# Altium PCB Exp4Board.pcbdoc
Units mil, origin at the board's own origin, x right, y up, seen from the top; angles counter-clockwise.
Board outline 4785 x 2895 mil, 2 copper layers (Top Layer, Bottom Layer); 14 components, 72 nets, 144 pads, 7 vias.
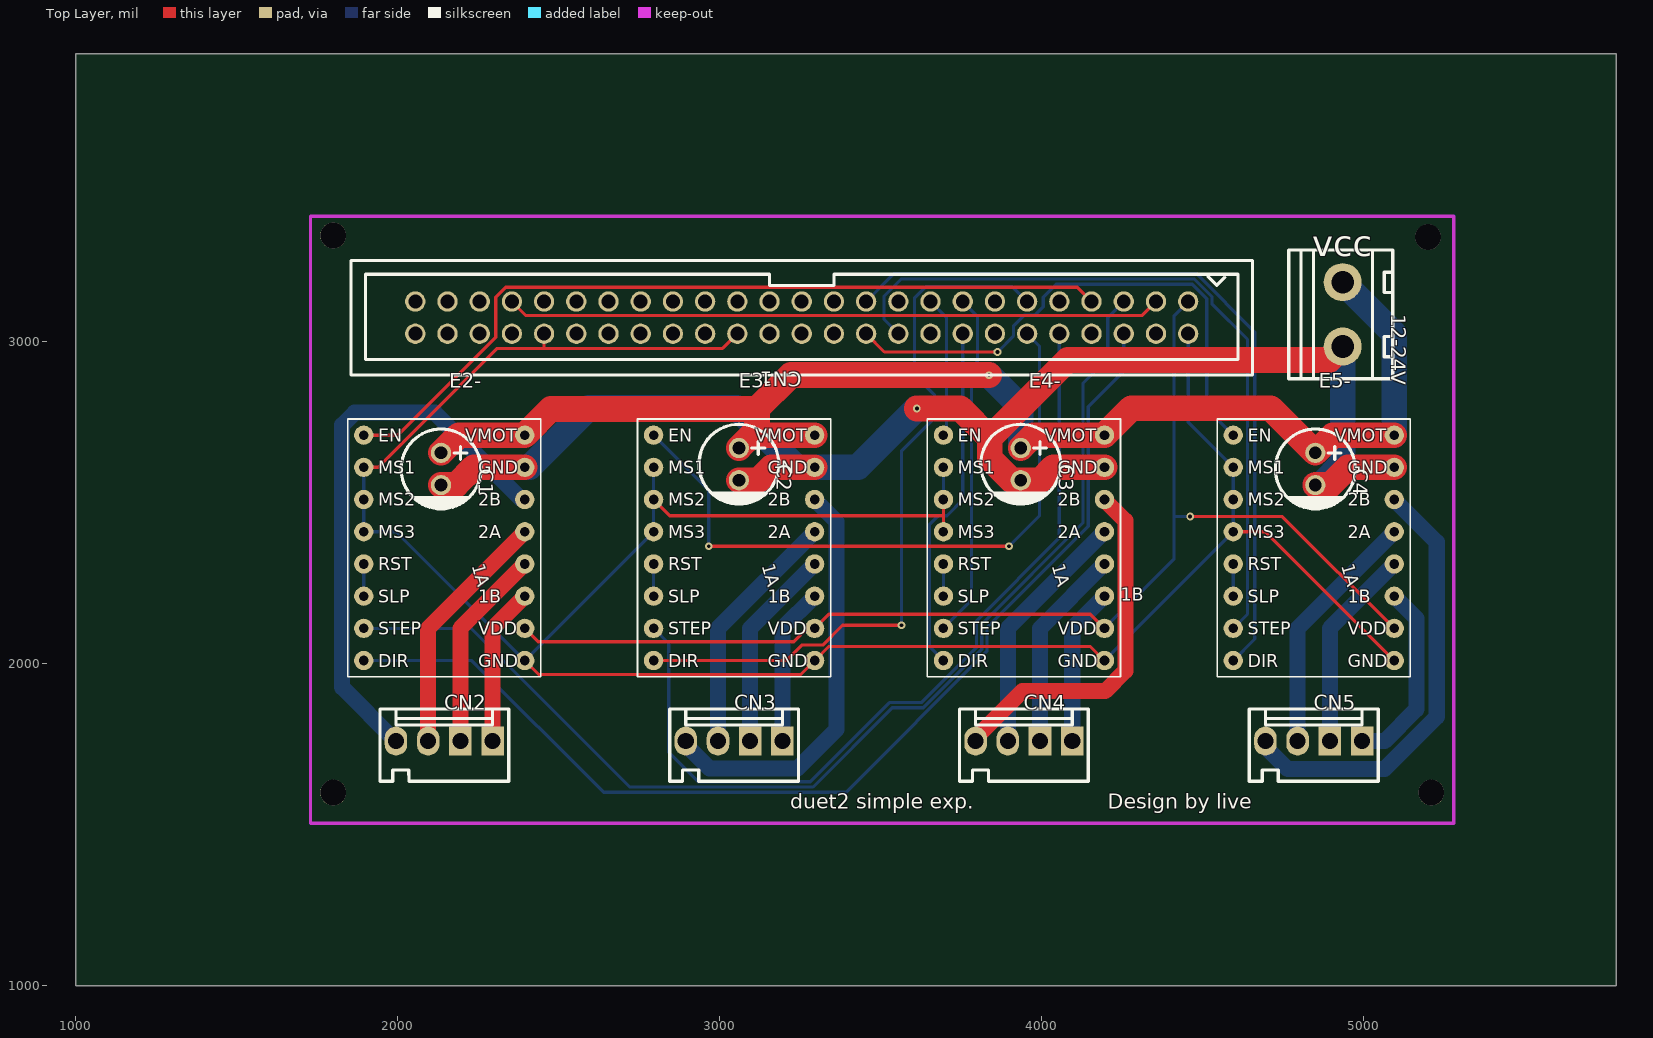
[diagram p0: Top Layer view]
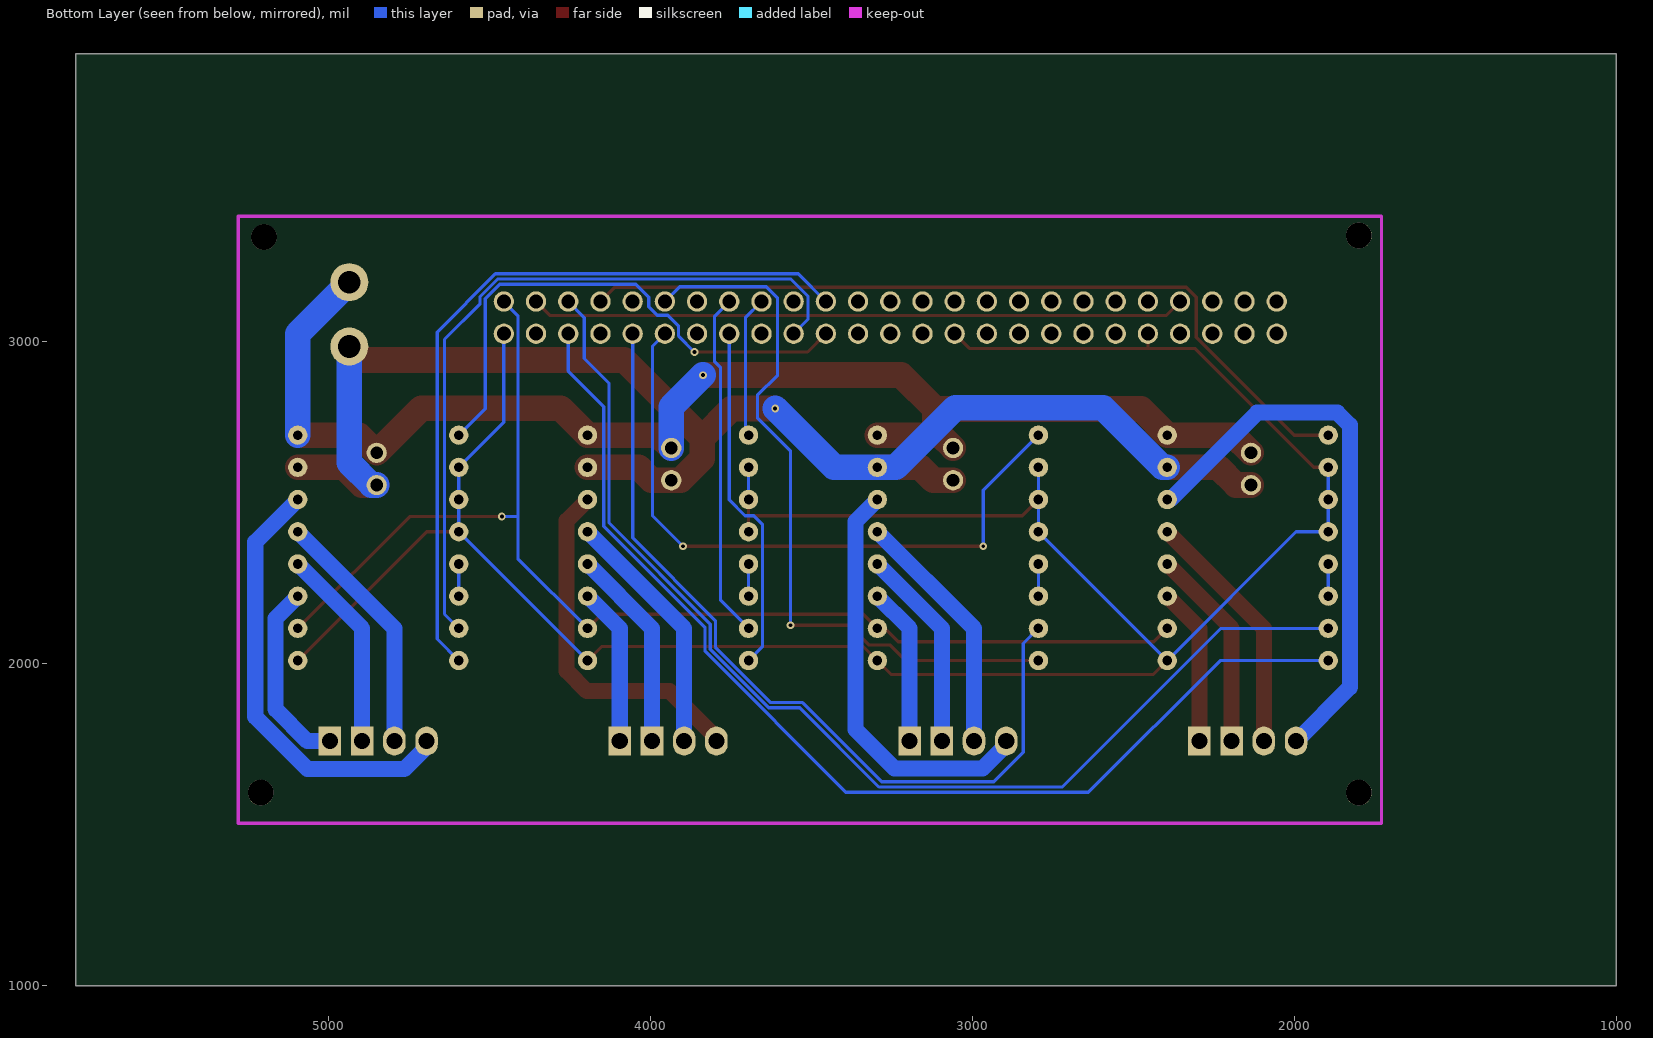
[diagram p1: Bottom Layer view, seen from below]

## Layer stack, top to bottom
Top Layer: signal copper (thickness not stored)
Dielectric: dielectric 12.6, FR-4, Dk 4.8
Bottom Layer: signal copper (thickness not stored)

## Board outline
5785,1000 1000,1000 1000,3895 5785,3895

## Components (designator, comment, footprint, x,y, rotation, side; value= is the part's Value field where it differs from the comment)
12-24V "12-24V" CONN-TH_2P-P5.08_JL127-50802G01 4935,3085 r270 top
C1 "100uF" CAP-TH_BD6.3-P2.50-D1.0-FD 2135,2605 r270 top
C2 "100uF" CAP-TH_BD6.3-P2.50-D1.0-FD 3060,2620 r270 top
C3 "100uF" CAP-TH_BD6.3-P2.50-D1.0-FD 3935,2620 r270 top
C4 "100uF" CAP-TH_BD6.3-P2.50-D1.0-FD 4850,2605 r270 top
CN1 "Z-231011050106" IDC-TH_Z-231011050106 3255,3075 r180 top
CN2 "A2543WV-4P" CONN-TH_A2543WV-4P 2145,1760 r0 top
CN3 "A2543WV-4P" CONN-TH_A2543WV-4P 3045,1760 r0 top
CN4 "A2543WV-4P" CONN-TH_A2543WV-4P 3945,1760 r0 top
CN5 "A2543WV-4P" CONN-TH_A2543WV-4P 4845,1760 r0 top
E2- "E2" "A4988 STEPPER MOTOR DRIVER CARRIER" 2145,2360 r0 top
E3- "A4988模块" "A4988 STEPPER MOTOR DRIVER CARRIER" 3045,2360 r0 top
E4- "A4988模块" "A4988 STEPPER MOTOR DRIVER CARRIER" 3945,2360 r0 top
E5- "A4988模块" "A4988 STEPPER MOTOR DRIVER CARRIER" 4845,2360 r0 top

## Footprints (in the part's own frame and the unit in brackets; to place one, negate y for a bottom-side part, rotate by r counter-clockwise, add the part's x,y. Pads: shape width x height; smd on the part's side, far side on the other; paste and mask are expansions set on the pad)
"A4988 STEPPER MOTOR DRIVER CARRIER" [mil]
  round 60 hole 30: 1(-250,350) 2(-250,250) 3(-250,150) 4(-250,50) 5(-250,-50) 6(-250,-150) 7(-250,-250) 8(-250,-350) 9(250,-350) 10(250,-250) 11(250,-150) 12(250,-50) 13(250,50) 14(250,150) 15(250,250) 16(250,350)
  silkscreen extent -300,-400 300,400
CAP-TH_BD6.3-P2.50-D1.0-FD [mm]
  round 1.6 hole 1: 1(-1.27,0) 2(1.27,0)
  silkscreen extent -3.15,-3.15 3.17,3.15
CONN-TH_2P-P5.08_JL127-50802G01 [mm]
  round 3 hole 1.8: 1(-2.54,0) 2(2.54,0)
  silkscreen extent -5.08,-4.25 5.08,3.95
CONN-TH_A2543WV-4P [mil]
  rect 70x90 hole 50: 1(150,0) 2(50,0)
  oval 70x89.97 hole 50: 3(-50,0) 4(-150,0)
  silkscreen extent -200,-125 200,100
IDC-TH_Z-231011050106 [mm]
  round 1.6 hole 1.1: 1(-30.48,-1.27) 2(-30.48,1.27) 3(-27.94,-1.27) 4(-27.94,1.27) 5(-25.4,-1.27) 6(-25.4,1.27) 7(-22.86,-1.27) 8(-22.86,1.27) 9(-20.32,-1.27) 10(-20.32,1.27) 11(-17.78,-1.27) 12(-17.78,1.27) 13(-15.24,-1.27) 14(-15.24,1.27) 15(-12.7,-1.27) 16(-12.7,1.27) 17(-10.16,-1.27) 18(-10.16,1.27) 19(-7.62,-1.27) 20(-7.62,1.27) 21(-5.08,-1.27) 22(-5.08,1.27) 23(-2.54,-1.27) 24(-2.54,1.27) 25(0,-1.27) 26(0,1.27) 27(2.54,-1.27) 28(2.54,1.27) 29(5.08,-1.27) 30(5.08,1.27) 31(7.62,-1.27) 32(7.62,1.27) 33(10.16,-1.27) 34(10.16,1.27) 35(12.7,-1.27) 36(12.7,1.27) 37(15.24,-1.27) 38(15.24,1.27) 39(17.78,-1.27) 40(17.78,1.27) 41(20.32,-1.27) 42(20.32,1.27) 43(22.86,-1.27) 44(22.86,1.27) 45(25.4,-1.27) 46(25.4,1.27) 47(27.94,-1.27) 48(27.94,1.27) 49(30.48,-1.27) 50(30.48,1.27)
  silkscreen extent -35.55,-4.5 35.55,4.52

## Free pads (board coordinates)
  round 80 hole 80 unplated: ""(1800,1600) ""(1800,3330) ""(5200,3325) ""(5210,1600)

## Via types
v1: diameter 24, hole 12, Top Layer to Bottom Layer, 7 vias

## Nets (pads, with @x,y where several pads share a name; then routed paths per layer and width w, separated by ;. In a path a pad name is that pad's centre, name@x,y a point inside that pad or via, vN(x,y) a via of type N, cw(c..) or ccw(c..) an arc to the next point about the centre after c; other vN are vias at no path point)
3.3V: CN1.3 CN1.43 | length 2036.3
  Top Layer w10: CN1.43 2398.8,3081.2 4311.3,3081.2 CN1.3
5V: CN1.1 E2-.10 E3-.10 E4-.10 E5-.10 | length 3821
  Top Layer w10: E2-.10 2436.8,2068.2 3230.4,2068.2 3272.2,2110 E3-.10 3338.8,2153.7 4151.3,2153.7 E4-.10 ; v1(4461.3,2457.2) 4747.8,2457.2 E5-.10
  Bottom Layer w10: E4-.10 4411.3,2326.2 4411.3,2457.2 ; CN1.1 4411.3,3081.2 4411.3,2457.2 ; v1(4461.3,2457.2) 4411.3,2457.2
CN1_32: CN1.32
CN1_33: CN1.33
CN1_34: CN1.34
CN1_35: CN1.35
CN1_36: CN1.36
CN1_37: CN1.37
CN1_38: CN1.38
CN1_39: CN1.39
CN1_40: CN1.40
CN1_41: CN1.41
CN1_44: CN1.44
CN1_45: CN1.45
CN1_46: CN1.46
CN1_47: CN1.47
CN1_48: CN1.48
CN1_49: CN1.49
CN1_50: CN1.50
E2-_5: E2-.5 E2-.6 | length 100
  Bottom Layer w10: E2-.6 E2-.5
E2-_11: CN2.1 E2-.11 | length 491.4
  Top Layer w50: CN2.1 2295,2110 E2-.11
E2-_12: CN2.2 E2-.12 | length 632.8
  Top Layer w50: CN2.2 2195,2110 E2-.12
E2-_13: CN2.3 E2-.13 | length 774.3
  Top Layer w50: CN2.3 2095,2110 E2-.13
E2-_14: CN2.4 E2-.14 | length 1745.8
  Bottom Layer w50: CN2.4 1827.7,1927.3 1827.7,2741.2 1866.8,2780.2 2115.8,2780.2 2386,2510 E2-.14
E2_DIR: CN1.6 E2-.8 | length 3448.1
  Bottom Layer w10: E2-.8 2230.9,2010 2639.6,1601.3 3393.1,1601.3 3830.2,2038.4 3830.2,2112.5 4144.7,2426.9 4144.7,2798.8 4255,2909.1 CN1.6
E2_ENABLE: CN1.7 E2-.1 | length 2541.4
  Top Layer w10: E2-.1 2000.8,2710 2305,3014.2 2305,3138.8 2335.3,3169.1 4110.9,3169.1 CN1.7
E2_STEP: CN1.5 E2-.7 | length 3562.9
  Bottom Layer w10: E2-.7 2228,2110 2720.6,1617.4 3290.2,1617.4 3536.3,1863.5 3632.6,1863.5 3814.1,2045.1 3814.1,2123.2 4128.5,2437.6 4128.5,2871.7 4205,2948.1 4205,3075 CN1.5
E2_STOP: CN1.4
E3-_5: E3-.5 E3-.6 | length 100
  Bottom Layer w10: E3-.6 E3-.5
E3-_11: CN3.1 E3-.11 | length 491.4
  Bottom Layer w50: CN3.1 3195,2110 E3-.11
E3-_12: CN3.2 E3-.12 | length 632.8
  Bottom Layer w50: CN3.2 3095,2110 E3-.12
E3-_13: CN3.3 E3-.13 | length 774.3
  Bottom Layer w50: CN3.3 2995,2110 E3-.13
E3-_14: CN3.4 E3-.14 | length 1301.8
  Bottom Layer w50: CN3.4 2895,1748.8 2968.4,1675.4 3242.2,1675.4 3363.2,1796.4 3363.2,2441.8 E3-.14
E3_DIR: CN1.11 E3-.8 | length 2283.4
  Top Layer w10: E3-.8 3206.4,2010 3254.6,2058.2 3320.4,2058.2 3381.7,2119.5 v1(3564.5,2119.5)
  Bottom Layer w10: v1(3564.5,2119.5) 3564.5,2660.5 3667.6,2763.6 3667.6,2833.8 3605,2896.3 3605,3135.7 3640.4,3171 3909,3171 CN1.11
E3_ENABLE: CN1.12 E3-.1 | length 2063.5
  Top Layer w10: v1(2966.3,2365) v1(3898.6,2365)
  Bottom Layer w10: E3-.1 2966.3,2538.7 v1(2966.3,2365) ; v1(3898.6,2365) 3993.5,2459.9 3993.5,2986.5 CN1.12
E3_STEP: CN1.10 E3-.7 | length 2651.4
  Bottom Layer w10: E3-.7 2841.9,2063.1 2841.9,1725 2933.4,1633.5 3281.2,1633.5 3527.3,1879.6 3625.9,1879.6 3798,2051.8 3798,2134 4055,2391 CN1.10
E3_STOP: CN1.9
E4-_5: E4-.5 E4-.6 | length 100
  Bottom Layer w10: E4-.6 E4-.5
E4-_11: CN4.1 E4-.11 | length 491.4
  Bottom Layer w50: CN4.1 4095,2110 E4-.11
E4-_12: CN4.2 E4-.12 | length 632.8
  Bottom Layer w50: CN4.2 3995,2110 E4-.12
E4-_13: CN4.3 E4-.13 | length 774.3
  Bottom Layer w50: CN4.3 3895,2110 E4-.13
E4-_14: CN4.4 E4-.14 | length 1120.4
  Top Layer w50: CN4.4 3795,1769.7 3940.3,1915 4197.4,1915 4260.3,1977.9 4260.3,2444.7 E4-.14
E4_DIR: CN1.16 E4-.8 | length 1091.7
  Bottom Layer w10: E4-.8 3652,2053 3652,2433.5 3678.5,2460 3706.2,2460 3755,2508.8 CN1.16
E4_ENABLE: CN1.17 E4-.1 | length 439.9
  Bottom Layer w10: CN1.17 3705,3075 3705,2720 E4-.1
E4_STEP: CN1.15 E4-.7 | length 1077.7
  Bottom Layer w10: E4-.7 3781.9,2196.9 3781.9,2919.2 3800.7,2938 3800.7,3079.3 CN1.15
E4_STOP: CN1.14
E5-_5: E5-.5 E5-.6 | length 100
  Bottom Layer w10: E5-.6 E5-.5
E5-_11: CN5.1 E5-.11 | length 589.6
  Bottom Layer w50: CN5.1 5065,1760 5164,1858.9 5164,2141 E5-.11
E5-_12: CN5.2 E5-.12 | length 632.8
  Bottom Layer w50: CN5.2 4895,2110 E5-.12
E5-_13: CN5.3 E5-.13 | length 774.3
  Bottom Layer w50: CN5.3 4795,2110 E5-.13
E5-_14: CN5.4 E5-.14 | length 1374.5
  Bottom Layer w50: CN5.4 4695,1742.4 4764.3,1673.1 5064.4,1673.1 5226.9,1835.7 5226.9,2378.1 E5-.14
E5_DIR: CN1.21 E5-.8 | length 2365.4
  Bottom Layer w10: CN1.21 3541.1,3211.1 4481.1,3211.1 4661.9,3030.2 4661.9,2076.9 E5-.8
E5_ENABLE: CN1.22 E5-.1 | length 1680.4
  Top Layer w10: CN1.22 3511.8,2968.2 v1(3863.2,2968.2)
  Bottom Layer w10: v1(3863.2,2968.2) 3912.4,3017.5 3912.4,3048.5 3946.3,3082.4 3978.5,3082.4 4005,3108.9 4005,3138.3 4045.6,3178.8 4467.8,3178.8 4512.7,3133.8 4512.7,2792.3 E5-.1
E5_STEP: CN1.20 E5-.7 | length 2292.5
  Bottom Layer w10: CN1.20 3510.4,3069.6 3510.4,3141.4 3563.9,3194.9 4474.4,3194.9 4528.9,3140.5 4528.9,3117.7 4639.2,3007.4 4639.2,2154.2 E5-.7
E5_STOP: CN1.19
E6_DIR: CN1.26
E6_ENABLE: CN1.27
E6_STEP: CN1.25
E6_STOP: CN1.24
ENN: CN1.28
GND: CN1.2 CN1.30 CN1.42 E2-.2 E2-.3 E2-.4 E2-.9 E3-.2 E3-.3 E3-.4 E3-.9 E4-.2 E4-.3 E4-.4 E4-.9 E5-.2 E5-.3 E5-.4 E5-.9 | length 7906.1
  Top Layer w10: E2-.2 1939.8,2610 2309.1,2979.3 2455,2979.3 ; E2-.9 2438.3,1966.7 3251.7,1966.7 E3-.9 3338.8,2053.7 4151.3,2053.7 E4-.9 ; CN1.42 2455,2979.3 ; E3-.3 2845,2460 3695,2460 ; CN1.30 3009.3,2979.3 2455,2979.3 ; E4-.4 3695,2460 ; E4-.3 3695,2460 ; E5-.4 4695,2410 E5-.9
  Bottom Layer w10: E2-.2 E2-.3 E2-.4 1995,2410 E2-.9 E3-.4 E3-.3 E3-.2 ; E4-.3 E4-.2 ; E4-.9 E5-.4 E5-.3 E5-.2 4455,2750 CN1.2
HEATER_3: CN1.8
HEATER_4: CN1.13
HEATER_5: CN1.18
HEATER_6: CN1.23
HEATER_7: CN1.31
MGND: 12-24V.2 C1.2 C2.2 C3.2 C4.2 E2-.15 E3-.15 E4-.15 E5-.15 | length 4665.7
  Top Layer w80: C1.2 2181.5,2555 2236.5,2610 E2-.15 ; C2.2 3121.5,2570 3161.5,2610 E3-.15 ; v1(3612.5,2793.1) 3747.2,2793.1 3839,2701.3 ; E4-.15 4036.5,2610 3996.5,2570 C3.2 3906.3,2570 3839,2637.3 3839,2701.3 ; C4.2 4896.5,2555 4951.5,2610 E5-.15 ; 12-24V.2 4893.5,2943.5 4081.2,2943.5 3839,2701.3
  Bottom Layer w80: E2-.15 2409.6,2610 2594.4,2794.9 3053.3,2794.9 3238.1,2610 E3-.15 3429.4,2610 v1(3612.5,2793.1) ; C4.2 4865.8,2555 4935,2624.2 12-24V.2
MVCC: 12-24V.1 C1.1 C2.1 C3.1 C4.1 E2-.16 E3-.16 E4-.16 E5-.16 | length 4234.4
  Top Layer w80: C1.1 2190,2710 E2-.16 2476.5,2791.5 3116.1,2791.5 ; C2.1 3100,2710 3116.1,2710 ; E3-.16 3116.1,2710 ; v1(3836.9,2896.4) 3220.9,2896.4 3116.1,2791.5 ; C3.1 3975,2710 E4-.16 4278.2,2793.2 4711.8,2793.2 C4.1 4905,2710 E5-.16 ; 3116.1,2710 3116.1,2791.5
  Bottom Layer w80: v1(3836.9,2896.4) 3935,2798.3 C3.1 ; 12-24V.1 5095,3025 E5-.16
PB6: CN1.29
S$34: 
S$56: 
S$58: 

## Silkscreen, mask and mechanical layers (free items; w line width, h text height)
Top Overlay:
  text "vcc" at 4840,3265 h80
  text "duet2 simple exp." at 3220,1535 h80
  text "Design by live" at 4205,1535 h80

## Text inside footprints (layer, text, board x,y; h text height)
E2-: Top Overlay "MS1" at 1940,2590 h40; Top Overlay "MS2" at 1940,2490 h40; Top Overlay "MS3" at 1940,2390 h40; Top Overlay "STEP" at 1940,2090 h40; Top Overlay "DIR" at 1940,1990 h40; Top Overlay "GND" at 2250,1990 h40; Top Overlay "VDD" at 2250,2090 h40; Top Overlay "1B" at 2250,2190 h40; Top Overlay "1A" at 2230.77,2304.49 h40 r286; Top Overlay "2A" at 2250,2390 h40; Top Overlay "2B" at 2250,2490 h40; Top Overlay "GND" at 2250,2590 h40; Top Overlay "VMOT" at 2210,2690 h40; Top Overlay "EN" at 1940,2690 h40; Top Overlay "RST" at 1940,2290 h40; Top Overlay "SLP" at 1940,2190 h40; Document "A4988 Stepper Motor Driver Carrier" at 1500,2815 h50
E3-: Top Overlay "MS1" at 2840,2590 h40; Top Overlay "MS2" at 2840,2490 h40; Top Overlay "MS3" at 2840,2390 h40; Top Overlay "STEP" at 2840,2090 h40; Top Overlay "DIR" at 2840,1990 h40; Top Overlay "GND" at 3150,1990 h40; Top Overlay "VDD" at 3150,2090 h40; Top Overlay "1B" at 3150,2190 h40; Top Overlay "1A" at 3130.77,2304.49 h40 r286; Top Overlay "2A" at 3150,2390 h40; Top Overlay "2B" at 3150,2490 h40; Top Overlay "GND" at 3150,2590 h40; Top Overlay "VMOT" at 3110,2690 h40; Top Overlay "EN" at 2840,2690 h40; Top Overlay "RST" at 2840,2290 h40; Top Overlay "SLP" at 2840,2190 h40; Document "A4988 Stepper Motor Driver Carrier" at 2400,2815 h50
E4-: Top Overlay "MS1" at 3740,2590 h40; Top Overlay "MS2" at 3740,2490 h40; Top Overlay "MS3" at 3740,2390 h40; Top Overlay "STEP" at 3740,2090 h40; Top Overlay "DIR" at 3740,1990 h40; Top Overlay "GND" at 4050,1990 h40; Top Overlay "VDD" at 4050,2090 h40; Top Overlay "1B" at 4245,2195 h40; Top Overlay "1A" at 4030.77,2304.49 h40 r286; Top Overlay "2A" at 4050,2390 h40; Top Overlay "2B" at 4050,2490 h40; Top Overlay "GND" at 4050,2590 h40; Top Overlay "VMOT" at 4010,2690 h40; Top Overlay "EN" at 3740,2690 h40; Top Overlay "RST" at 3740,2290 h40; Top Overlay "SLP" at 3740,2190 h40; Document "A4988 Stepper Motor Driver Carrier" at 3300,2815 h50
E5-: Top Overlay "MS1" at 4640,2590 h40; Top Overlay "MS2" at 4640,2490 h40; Top Overlay "MS3" at 4640,2390 h40; Top Overlay "STEP" at 4640,2090 h40; Top Overlay "DIR" at 4640,1990 h40; Top Overlay "GND" at 4950,1990 h40; Top Overlay "VDD" at 4950,2090 h40; Top Overlay "1B" at 4950,2190 h40; Top Overlay "1A" at 4930.77,2304.49 h40 r286; Top Overlay "2A" at 4950,2390 h40; Top Overlay "2B" at 4950,2490 h40; Top Overlay "GND" at 4950,2590 h40; Top Overlay "VMOT" at 4910,2690 h40; Top Overlay "EN" at 4640,2690 h40; Top Overlay "RST" at 4640,2290 h40; Top Overlay "SLP" at 4640,2190 h40; Document "A4988 Stepper Motor Driver Carrier" at 4200,2815 h50